# Altium PCB Main_PCB.PcbDoc (part 1 of 2)
Units mm, origin at the board's own origin, x right, y up, seen from the top; angles counter-clockwise.
Board outline 74.9 x 85.44 mm, 4 copper layers (Top Layer, 3V3, GND, Bottom Layer), stack 1.57 mm thick; 139 components, 106 nets, 541 pads, 0 vias.
Unrouted connection lines stored in the file: 412.
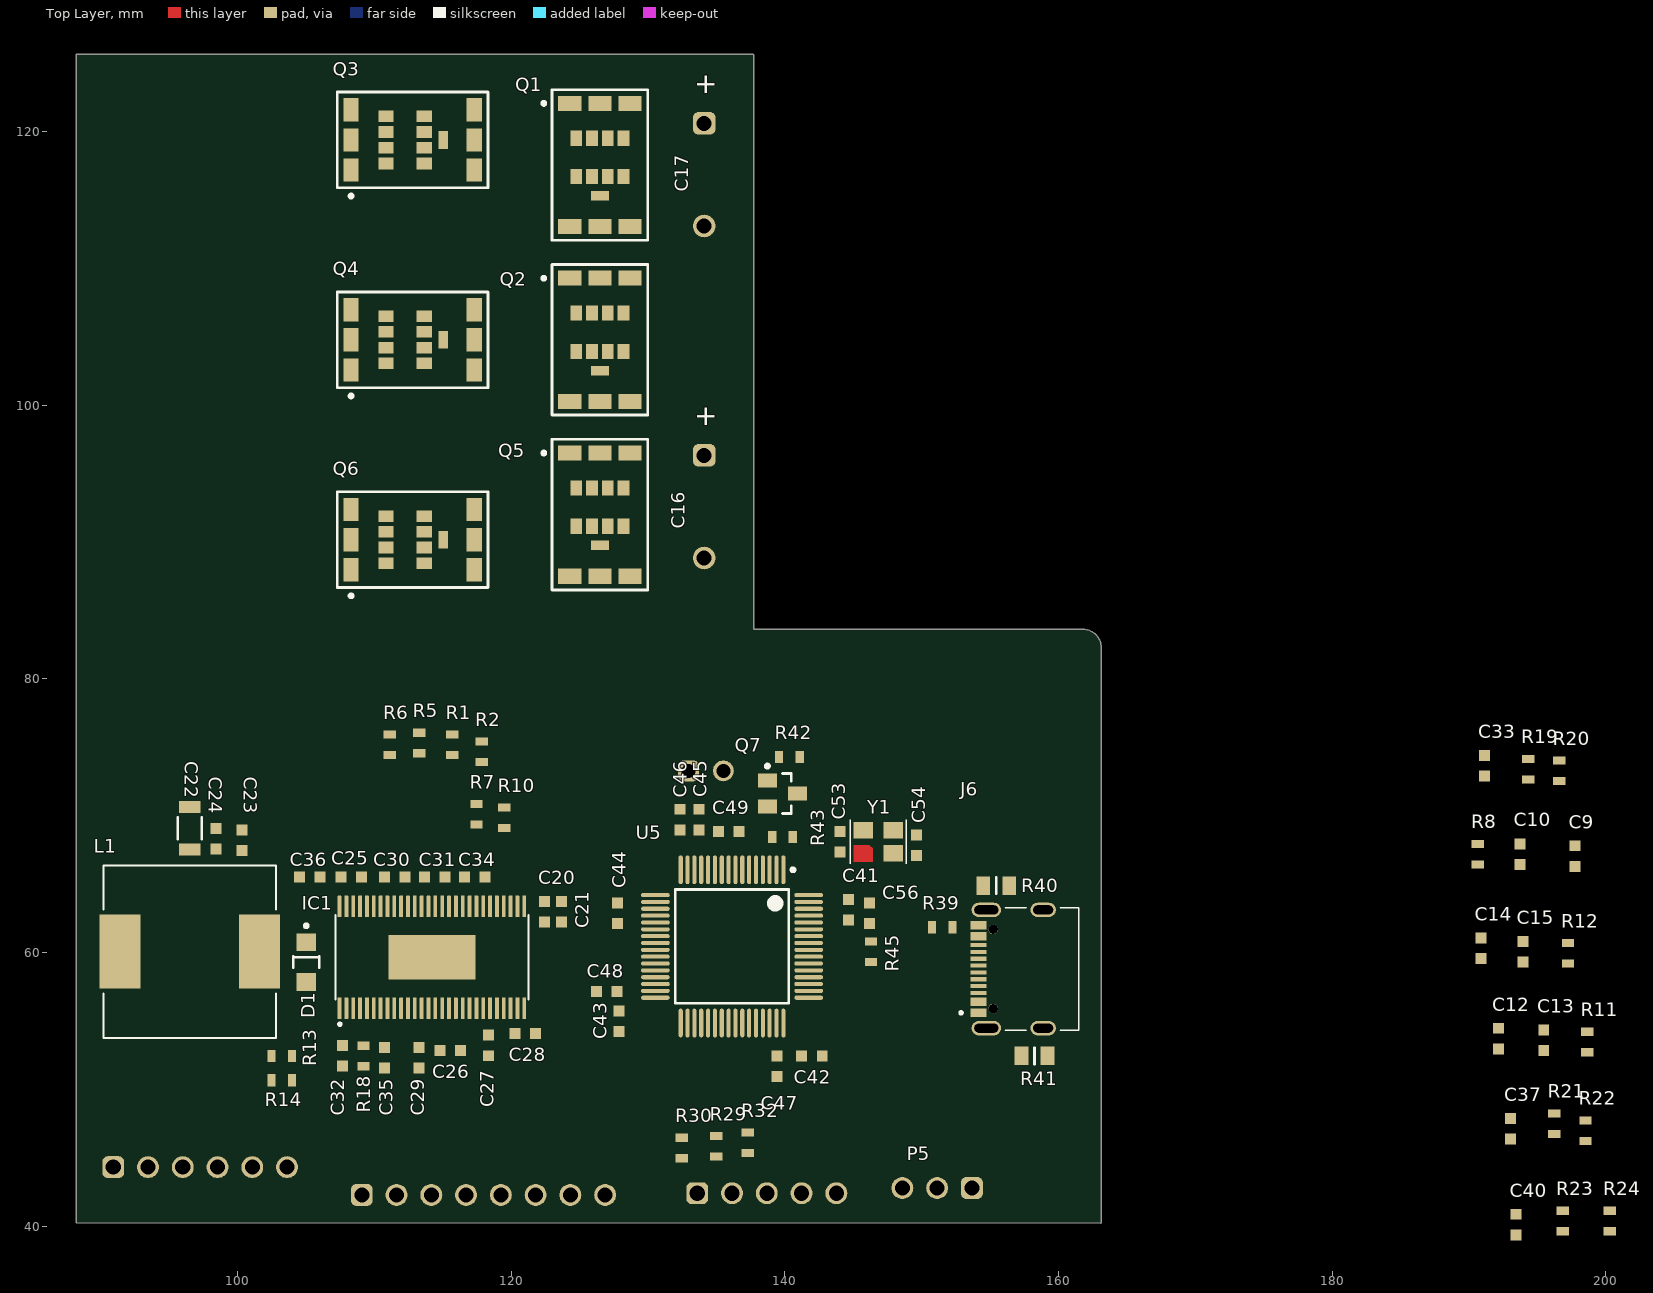
[diagram p0: Top Layer view]
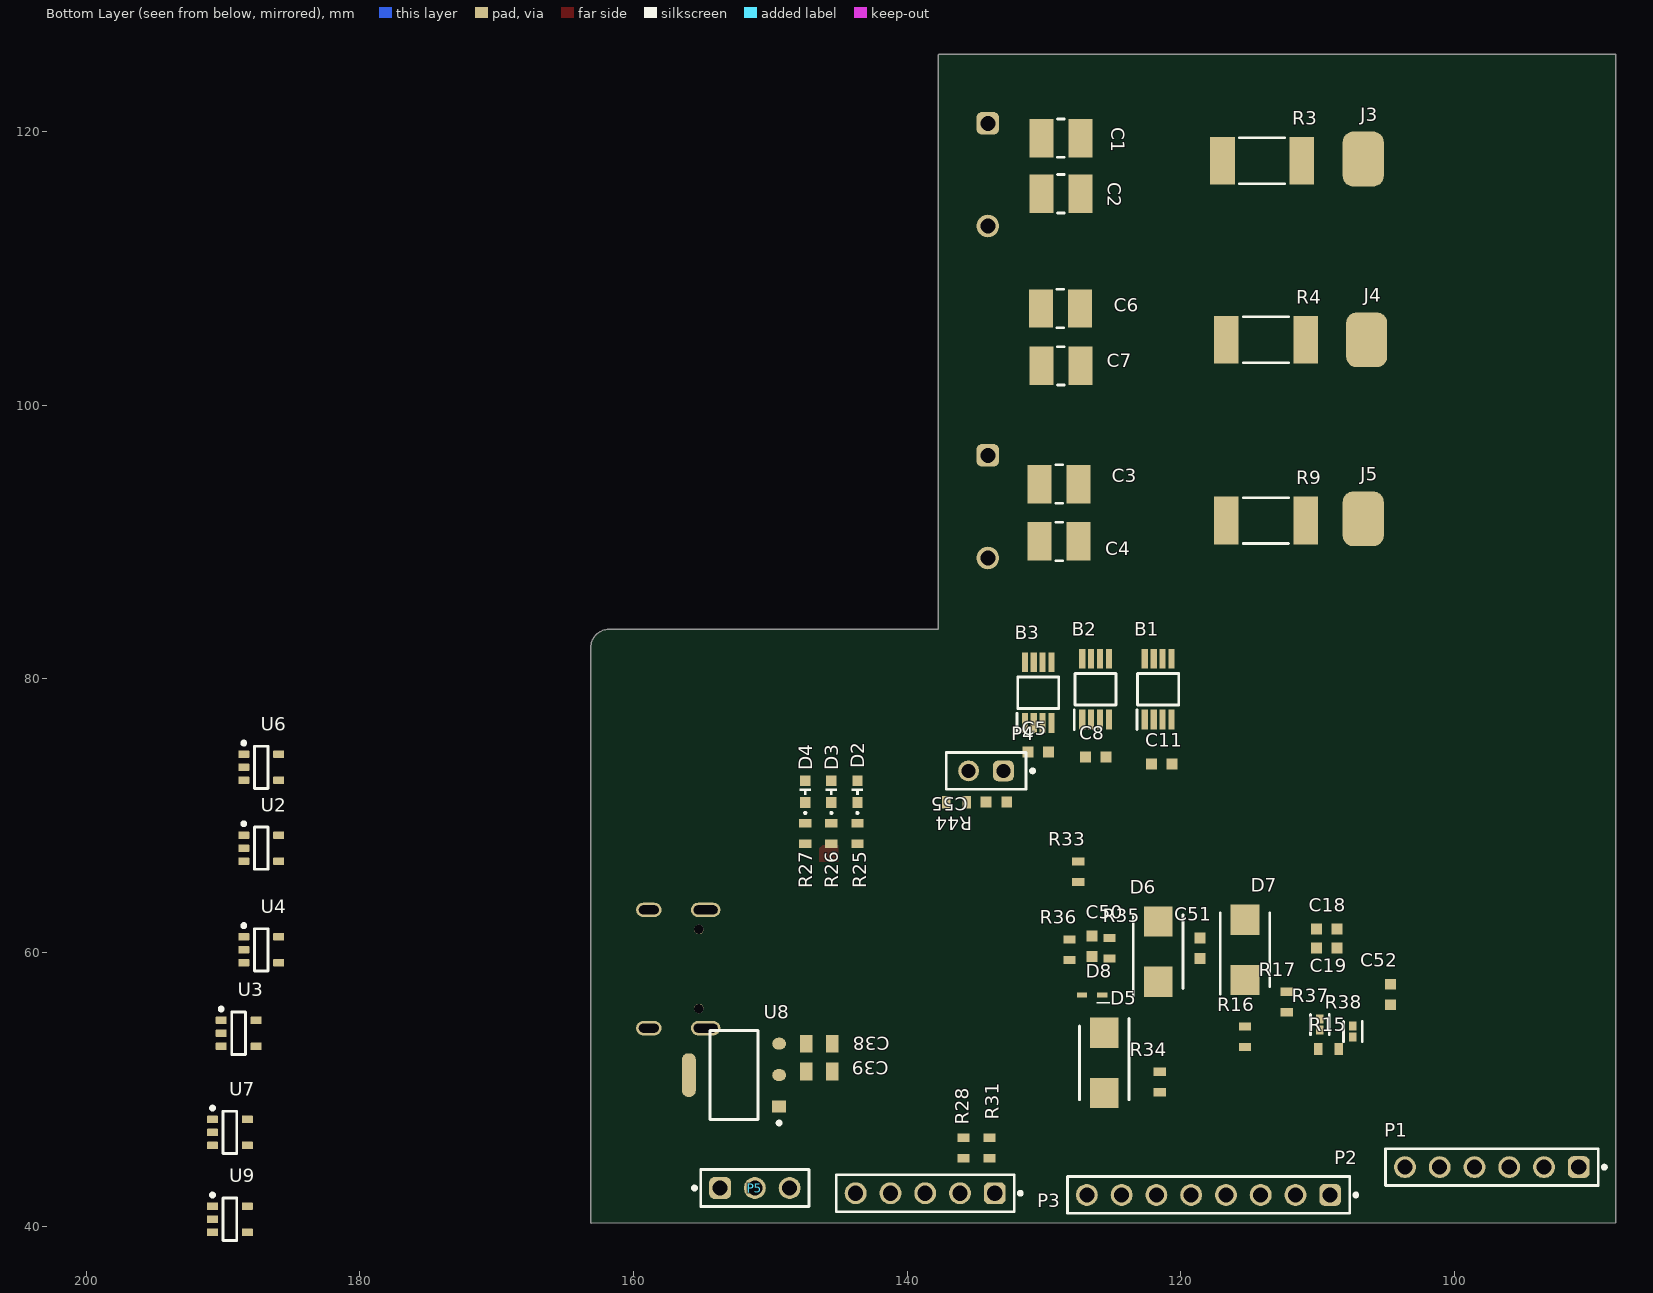
[diagram p1: Bottom Layer view, seen from below]

## Layer stack, top to bottom
Top Solder: solder mask 0.0127, Solder Resist, Dk 3.8
Top Layer: signal copper 0.035
Dielectric 1: prepreg 0.2, 7628, Dk 4.6
3V3: signal copper 0.0175
Core: core 1.065, FR-4, Dk 4.5
GND: signal copper 0.0175
Dielectric 2: prepreg 0.2, 7628, Dk 4.6
Bottom Layer: signal copper 0.035
Bottom Solder: solder mask 0.0127, Solder Resist, Dk 3.8

## Board outline
88.215,40.259 88.215,125.603 88.265,125.653 137.668,125.653 137.718,125.603 137.718,83.616 161.798,83.616 cw(c161.798,82.296) 163.118,82.297 163.118,81.788 163.118,82.296 163.118,40.259 163.068,40.209

## Design rules (kind name [scope] priority, off if disabled: settings)
BoardOutlineClearance [All] p1: gap=0.2 ignorepadtopadclearanceinfootprint=FALSE
Clearance [All] p1: gap=0.127 ignorepadtopadclearanceinfootprint=FALSE except(0.25: Arc-Hole Track-Hole SMDPad-Hole THPad-Hole Via-Hole Fill-Hole Poly-Hole Region-Hole Text-Hole)
ComponentClearance [All] p1: gap=0.127 collisioncheckmode=3 verticalgap=0.127 showdistances=TRUE
DiffPairsRouting [All] p1: maxlimit=0.254 minlimit=0.127 mostfreqgap=0.254 toplayer_prefgap=0.127 toplayer_minwidth=0.127 toplayer_maxwidth=25.4 toplayer_prefwidth=0.127 midlayer1_mingap=0.254 midlayer1_minwidth=0.381 midlayer1_maxwidth=0.381 midlayer1_prefwidth=0.381 midlayer2_mingap=0.254 midlayer2_minwidth=0.381 midlayer2_maxwidth=0.381 midlayer2_prefwidth=0.381 bottomlayer_prefgap=0.127 bottomlayer_minwidth=0.127 bottomlayer_maxwidth=25.4 bottomlayer_prefwidth=0.127 maxuncoupledlength=12.7
Height [All] p1: minheight=0 maxheight=1816.048 prefheight=12.7
HoleSize [All] p1: absolutevalues=TRUE maxlimit=6.3 minlimit=0.15 maxpercent=80.000 minpercent=20.000
HoleToHoleClearance [All] p1: gap=0.25 allowstackedmicrovias=FALSE
MinimumAnnularRing [All] p1: minimumring=0.075
MinimumSolderMaskSliver [All] p1: minsoldermaskwidth=0
PlaneClearance [All] p1: clearance=0.127
PlaneConnect PlaneConnectPowerPads [InPadClass('PowerPads')] p1: planeconnectstyle=Direct reliefexpansion=0.508 reliefentries=4 reliefconductorwidth=0.254 reliefairgap=0.254
PlaneConnect [All] p2: pad.planeconnectstyle=Relief pad.reliefexpansion=0.3 pad.reliefentries=4 pad.reliefconductorwidth=0.127 pad.reliefairgap=0.127 via.planeconnectstyle=Direct via.reliefexpansion=0.3 via.reliefentries=4 via.reliefconductorwidth=0.127 via.reliefairgap=0.127
PolygonConnect PolygonConnectPowerPads [All vs (InPadClass('PowerPads'))] p1: connectstyle=Direct reliefconductorwidth=0.254 reliefentries=4 polygonreliefangle="90 Angle" airgapwidth=0.254
PolygonConnect [All] p2: thpad.connectstyle=Relief thpad.reliefconductorwidth=0.3 thpad.reliefentries=4 thpad.polygonreliefangle="90 Angle" thpad.airgapwidth=0.127 thpad.conductorbypadedge=TRUE thpad.mindistance=0.381 thpad.enablemindistance=FALSE smdpad.connectstyle=Relief smdpad.reliefconductorwidth=0.3 smdpad.reliefentries=4 smdpad.polygonreliefangle="90 Angle" smdpad.airgapwidth=0.127 smdpad.conductorbypadedge=TRUE smdpad.mindistance=0.381 smdpad.enablemindistance=FALSE via.connectstyle=Direct via.reliefconductorwidth=0.127 via.reliefentries=4 via.polygonreliefangle="90 Angle" via.airgapwidth=0.127
RoutingVias [All] p1: holewidth=0.3 width=0.6 viastyle="Through Hole" minholewidth=0.3 minwidth=0.6 maxholewidth=0.6 maxwidth=6.6
SilkToSilkClearance [All] p1: silktosilkclearance=0
SilkToSolderMaskClearance [IsPad] p1: minsilkscreentomaskgap=0.127 clearancetoexposedcopper=TRUE
SolderMaskExpansion SolderMaskExpansionVia [isVia] p1: expansion=0.102 istentingtop=TRUE
SolderMaskExpansion [All] p2: expansion=0.075 istentingtop=FALSE useseparateexpansions=TRUE expansionbottom=0.075 istentingbottom=FALSE
SupplyNets "Schematic Supply Nets_7" [InNet('VIN')] p1: voltage=0.000
SupplyNets "Schematic Supply Nets_6" [InNet('5V')] p2: voltage=0.000
SupplyNets "Schematic Supply Nets_5" [InNet('3V3')] p3: voltage=0.000
SupplyNets "Schematic Supply Nets_4" [InNet('GND')] p4: voltage=0.000
Width [All] p1: maxlimit=25.4 minlimit=0.127 preferedwidth=0.127 midlayer1_maxwidth=0.254 midlayer2_maxwidth=0.254 minimp=50.000000 maximp=50.000000 favimp=50.000000
20 further rules are at their usual default settings.

## Classes and differential pairs
component class U_STM32F405: C41 C42 C43 C44 C45 C46 C47 C48 C49 C53 C54 J6 R39 R40 R41 U5 Y1
component class U_Power: B1 B2 B3 C1 C2 C3 C4 C5 C6 C7 C8 C9 C10 C11 C12 C13 C14 C15 C16 C17 C55 J3 J4 J5 P4 Q1 Q2 Q3 Q4 Q5 Q6 R1 R2 R3 R4 R5 R6 R7 R8 R9 R10 R11 R12 R44 U2 U3 U4
component class U_DRV8301_Gate_Driver_Buck: C18 C19 C20 C21 C22 C23 C24 C25 C26 C27 C28 C29 C30 C31 C32 C33 C34 C35 C36 C37 C38 C39 C40 D1 IC1 L1 Q7 R13 R14 R15 R16 R17 R18 R19 R20 R21 R22 R23 R24 R42 R43 U1 U6 U7 U8 U9
component class Top_Design: C50 C51 C52 C56 D2 D3 D4 D5 D6 D7 D8 P1 P2 P3 P5 R25 R26 R27 R28 R29 R30 R31 R32 R33 R34 R35 R36 R37 R38 R45

## Components (designator, comment, footprint, x,y, rotation, side; value= is the part's Value field where it differs from the comment)
B1 "AD8418AWBRZ" SOP65P490X110-8N 121.666,79.248 r90 bottom
B2 "AD8418AWBRZ" SOP65P490X110-8N 126.238,79.248 r90 bottom
B3 "AD8418AWBRZ" SOP65P490X110-8N 130.429,78.994 r90 bottom
C1 "HMK325C7475KN-TE" FP-1210-L_3_2_0_3-W_2_5_0-IPC_A 128.778,119.507 r180 bottom
C2 "HMK325C7475KN-TE" FP-1210-L_3_2_0_3-W_2_5_0-IPC_A 128.778,115.443 r180 bottom
C3 "HMK325C7475KN-TE" FP-1210-L_3_2_0_3-W_2_5_0-IPC_A 128.905,94.234 r180 bottom
C4 "HMK325C7475KN-TE" FP-1210-L_3_2_0_3-W_2_5_0-IPC_A 128.905,90.043 r180 bottom
C5 "Generic Capacitor 4.7uF 0603" "Wurth 0603 capacitor" 130.429,74.649 r180 bottom value=4.7uF
C6 "HMK325C7475KN-TE" FP-1210-L_3_2_0_3-W_2_5_0-IPC_A 128.806,107.061 r180 bottom
C7 "HMK325C7475KN-TE" FP-1210-L_3_2_0_3-W_2_5_0-IPC_A 128.778,102.87 r180 bottom
C8 "Generic Capacitor 4.7uF 0603" "Wurth 0603 capacitor" 126.238,74.295 r180 bottom value=4.7uF
C9 "Generic Capacitor 15nF 0603" "Wurth 0603 capacitor" 197.739,67.056 r90 top value=15nF
C10 "Generic Capacitor 1nF 0603" "Wurth 0603 capacitor" 193.725,67.195 r90 top value=1nF
C11 "Generic Capacitor 4.7uF 0603" "Wurth 0603 capacitor" 121.412,73.787 r0 bottom value=4.7uF
C12 "Generic Capacitor 15nF 0603" "Wurth 0603 capacitor" 192.151,53.721 r90 top value=15nF
C13 "Generic Capacitor 1nF 0603" "Wurth 0603 capacitor" 195.453,53.594 r90 top value=1nF
C14 "Generic Capacitor 15nF 0603" "Wurth 0603 capacitor" 190.881,60.325 r90 top value=15nF
C15 "Generic Capacitor 1nF 0603" "Wurth 0603 capacitor" 193.929,60.071 r90 top value=1nF
C16 "NCC EKY-800ELL681MM25S" "WURTH THT CAP D18H25 - sideways" 134.112,92.583 r90 top value=680µF/80V
C17 "NCC EKY-800ELL681MM25S" "WURTH THT CAP D18H25 - sideways" 134.112,116.84 r90 top value=680µF/80V
C18 "Generic Capacitor 2.2uF 0603" "Wurth 0603 capacitor" 109.347,61.722 r180 bottom value=2.2uF
C19 "Generic Capacitor 100nF 0603" "Wurth 0603 capacitor" 109.347,60.325 r180 bottom value=100nF
C20 "Generic Capacitor 2.2uF 0603" "Wurth 0603 capacitor" 122.428,62.992 r90 top value=2.2uF
C21 "Generic Capacitor 100nF 0603" "Wurth 0603 capacitor" 123.698,62.992 r90 top value=100nF
C22 "Generic Capacitor 47uF 1206" "Wurth 1206 Capacitor" 96.52,69.088 r270 top value=47uF
C23 "Generic Capacitor 1uF 0603" "Wurth 0603 capacitor" 100.33,68.199 r270 top value=1uF
C24 "Generic Capacitor 100nF 0603" "Wurth 0603 capacitor" 98.425,68.326 r90 top value=100nF
C25 "Generic Capacitor 100nF 0603" "Wurth 0603 capacitor" 108.331,65.532 r180 top value=100nF
C26 "Generic Capacitor 22nF 0603" "Wurth 0603 capacitor" 115.57,52.832 r0 top value=22nF
C27 "Generic Capacitor 1uF 0603" "Wurth 0603 capacitor" 118.364,53.213 r90 top value=1uF
C28 "Generic Capacitor 1uF 0603" "Wurth 0603 capacitor" 121.031,54.102 r180 top value=1uF
C29 "Generic Capacitor 2.2uF 0603" "Wurth 0603 capacitor" 113.284,52.324 r90 top value=2.2uF
C30 "Generic Capacitor 100nF 0603" "Wurth 0603 capacitor" 111.506,65.532 r180 top value=100nF
C31 "Generic Capacitor 100nF 0603" "Wurth 0603 capacitor" 114.427,65.532 r180 top value=100nF
C32 "Generic Capacitor 120pF 0603" "Wurth 0603 capacitor" 107.696,52.451 r90 top value=120pF
C33 "Generic Capacitor 100nF 0603" "Wurth 0603 capacitor" 191.135,73.66 r90 top value=100nF
C34 "Generic Capacitor 100nF 0603" "Wurth 0603 capacitor" 117.348,65.532 r180 top value=100nF
C35 "Generic Capacitor 6.8nF 0603" "Wurth 0603 capacitor" 110.744,52.324 r90 top value=6.8nF
C36 "Generic Capacitor 15nF 0603" "Wurth 0603 capacitor" 105.283,65.532 r0 top value=15nF
C37 "Generic Capacitor 100nF 0603" "Wurth 0603 capacitor" 193.04,47.117 r90 top value=100nF
C38 "Generic Capacitor 10uF 0805" "Wurth 0805 capacitor" 146.431,53.34 r0 bottom value=10uF
C39 "Generic Capacitor 10uF 0805" "Wurth 0805 capacitor" 146.431,51.308 r0 bottom value=10uF
C40 "Generic Capacitor 100nF 0603" "Wurth 0603 capacitor" 193.421,40.132 r90 top value=100nF
C41 "Generic Capacitor 2.2uF 0603" "Wurth 0603 capacitor" 144.653,63.119 r90 top value=2.2uF
C42 "Generic Capacitor 2.2uF 0603" "Wurth 0603 capacitor" 141.986,52.451 r180 top value=2.2uF
C43 "Generic Capacitor 2.2uF 0603" "Wurth 0603 capacitor" 127.889,54.991 r90 top value=2.2uF
C44 "Generic Capacitor 2.2uF 0603" "Wurth 0603 capacitor" 127.762,62.865 r90 top value=2.2uF
C45 "Generic Capacitor 2.2uF 0603" "Wurth 0603 capacitor" 133.731,69.723 r270 top value=2.2uF
C46 "Generic Capacitor 2.2uF 0603" "Wurth 0603 capacitor" 132.334,69.723 r270 top value=2.2uF
C47 "Generic Capacitor 2.2uF 0603" "Wurth 0603 capacitor" 139.446,51.689 r90 top value=2.2uF
C48 "Generic Capacitor 2.2uF 0603" "Wurth 0603 capacitor" 127,57.15 r0 top value=2.2uF
C49 "Generic Capacitor 100nF 0603" "Wurth 0603 capacitor" 135.89,68.834 r0 top value=100nF
C50 "Generic Capacitor 1uF 0603" "Wurth 0603 capacitor" 126.492,60.452 r90 bottom value=1uF
C51 "Generic Capacitor 2.2uF 0603" "Wurth 0603 capacitor" 118.618,60.325 r270 bottom value=2.2uF
C52 "Generic Capacitor 100nF 0603" "Wurth 0603 capacitor" 104.697,56.938 r90 bottom value=100nF
C53 "Generic Capacitor 15pF 0603" "Wurth 0603 capacitor" 144.035,68.102 r270 top value=15pF
C54 "Generic Capacitor 15pF 0603" "Wurth 0603 capacitor" 149.623,67.848 r90 top value=15pF
C55 "Generic Capacitor 1uF 0603" "Wurth 0603 capacitor" 133.477,70.993 r180 bottom value=1uF
C56 "Generic Capacitor 100nF 0603" "Wurth 0603 capacitor" 146.177,62.865 r270 top value=100nF
D1 "V1FM10-M3/H" FP-V1FM10-M3-H-MFG 105.029,59.309 r90 top
D2 "Green, 3.2V, 140°" "Wurth 0603 LED" 143.637,71.755 r90 bottom
D3 "Red, 2V, 140°" "Wurth 0603 LED" 145.542,71.755 r90 bottom
D4 "Blue, 3.2V, 140°" "Wurth 0603 LED" 147.447,71.755 r90 bottom
D5 "SS34" "MDD DO-214AC diode" 125.603,51.943 r270 bottom
D6 "SS34" "MDD DO-214AC diode" 121.666,60.071 r90 bottom
D7 "SS34" "MDD DO-214AC diode" 115.316,60.198 r90 bottom
D8 "ROHM EDZVT2R3.6B" "ROHM SOD-523 zener" 126.492,56.896 r0 bottom
IC1 "DRV8301DCA" "TI HTSSOP-56-6mm" 114.216,59.653 r90 top
J3 "PHASE_A" "Solder Pad 3X4MM" 106.68,117.983 r0 top
J4 "PHASE_B" "Solder Pad 3X4MM" 106.426,104.775 r0 top
J5 "PHASE_C" "Solder Pad 3X4MM" 106.68,91.694 r0 top
J6 "KH-TYPE-C-16P" KINGHELM_KH-TYPE-C-16P 158.877,58.801 r90 top
L1 "FH 33uH 3A" "FH MS127-330MT" 96.52,60.071 r0 top value=33uH
P1 "61300611121" "6x1 2.54mm M" 97.282,44.323 r0 bottom
P2 "61300811121" "8x1 2.54mm M" 117.983,42.291 r0 bottom
P3 "61300511121" "5x1 2.54mm M" 138.684,42.418 r0 bottom
P4 "61300211121" "2x1 2.54mm F" 134.241,73.279 r0 bottom
P5 "61300311121" "3x1 2.54mm M" 151.13,42.799 r180 bottom
Q1 "IRF7749L1" "INFINEON DIRECTFET-L8-V" 126.492,117.55 r0 top
Q2 "IRF7749L1" "INFINEON DIRECTFET-L8-V" 126.492,104.775 r0 top
Q3 "IRF7749L1" "INFINEON DIRECTFET-L8-V" 112.808,119.38 r90 top
Q4 "IRF7749L1" "INFINEON DIRECTFET-L8-V" 112.808,104.775 r90 top
Q5 "IRF7749L1" "INFINEON DIRECTFET-L8-V" 126.492,92 r0 top
Q6 "IRF7749L1" "INFINEON DIRECTFET-L8-V" 112.808,90.17 r90 top
Q7 "BSS123" FAIR-SOT23-3_V 139.827,71.628 r270 top
R1 "Generic Resistor 4k7 0603" "Wurth 0603 Resistor" 115.697,75.184 r90 top value=4R7
R2 "Generic Resistor 4k7 0603" "Wurth 0603 Resistor" 117.856,74.676 r90 top value=4R7
R3 "Yezhan ASR-M-3-0.5F" "WURTH 2512 RESISTOR" 114.067,117.856 r0 bottom value=0.5m
R4 "Yezhan ASR-M-3-0.5F" "WURTH 2512 RESISTOR" 113.792,104.775 r0 bottom value=0.5m
R5 "Generic Resistor 4k7 0603" "Wurth 0603 Resistor" 113.284,75.311 r90 top value=4R7
R6 "Generic Resistor 4k7 0603" "Wurth 0603 Resistor" 111.125,75.184 r90 top value=4R7
R7 "Generic Resistor 4k7 0603" "Wurth 0603 Resistor" 117.475,70.104 r90 top value=4R7
R8 "Generic Resistor 1k 0603" "Wurth 0603 Resistor" 190.627,67.195 r270 top value=1k
R9 "Yezhan ASR-M-3-0.5F" "WURTH 2512 RESISTOR" 113.792,91.567 r0 bottom value=0.5m
R10 "Generic Resistor 4k7 0603" "Wurth 0603 Resistor" 119.507,69.85 r90 top value=4R7
R11 "Generic Resistor 1k 0603" "Wurth 0603 Resistor" 198.628,53.467 r270 top value=1k
R12 "Generic Resistor 1k 0603" "Wurth 0603 Resistor" 197.231,59.944 r90 top value=1k
R13 "Generic Resistor 50k 0603" "Wurth 0603 Resistor" 103.251,52.451 r180 top value=50k
R14 "Generic Resistor 10k 0603" "Wurth 0603 Resistor" 103.251,50.673 r0 top value=10k
R15 "Generic Resistor 220k 0603" "Wurth 0603 Resistor" 109.22,52.959 r0 bottom value=220k
R16 "Generic Resistor 10k 0603" "Wurth 0603 Resistor" 115.316,53.848 r90 bottom value=10k
R17 "Generic Resistor 10k 0603" "Wurth 0603 Resistor" 112.268,56.388 r90 bottom value=10k
R18 "Generic Resistor 16k2 0603" "Wurth 0603 Resistor" 109.22,52.451 r90 top value=16k2
R19 "Generic Resistor 39k 0603" "Wurth 0603 Resistor" 194.31,73.406 r90 top value=39k
R20 "Generic Resistor 2k2 0603" "Wurth 0603 Resistor" 196.596,73.279 r90 top value=2k2
R21 "Generic Resistor 39k 0603" "Wurth 0603 Resistor" 196.215,47.498 r90 top value=39k
R22 "Generic Resistor 2k2 0603" "Wurth 0603 Resistor" 198.501,46.99 r90 top value=2k2
R23 "Generic Resistor 39k 0603" "Wurth 0603 Resistor" 196.85,40.386 r90 top value=39k
R24 "Generic Resistor 2k2 0603" "Wurth 0603 Resistor" 200.279,40.386 r90 top value=2k2
R25 "Generic Resistor 330R 0603" "Wurth 0603 Resistor" 143.637,68.707 r270 bottom value=330R
R26 "Generic Resistor 330R 0603" "Wurth 0603 Resistor" 145.542,68.707 r270 bottom value=330R
R27 "Generic Resistor 1k 0603" "Wurth 0603 Resistor" 147.447,68.707 r270 bottom value=1k
R28 "Generic Resistor 0R 0603" "Wurth 0603 Resistor" 135.89,45.72 r90 bottom value=0R
R29 "Generic Resistor 2k2 0603" "Wurth 0603 Resistor" 135.001,45.847 r90 top value=2k2
R30 "Generic Resistor 2k2 0603" "Wurth 0603 Resistor" 132.461,45.72 r90 top value=2k2
R31 "Generic Resistor 0R 0603" "Wurth 0603 Resistor" 133.985,45.72 r90 bottom value=0R
R32 "Generic Resistor 2k2 0603" "Wurth 0603 Resistor" 137.287,46.101 r90 top value=2k2
R33 "Generic Resistor 10k 0603" "Wurth 0603 Resistor" 127.508,65.901 r90 bottom value=10k
R34 "Generic Resistor 39k 0603" "Wurth 0603 Resistor" 121.539,50.546 r90 bottom value=39k
R35 "Generic Resistor 52k3 0603" "Wurth 0603 Resistor" 125.222,60.325 r90 bottom value=52k3
R36 "Generic Resistor 220R 0603" "Wurth 0603 Resistor" 128.143,60.21 r90 bottom value=220R
R37 "PRF15BC102RB6RC" FP-PRF15-0_05-IPC_B 109.855,54.737 r90 bottom
R38 "PRF15BC102RB6RC" FP-PRF15-0_05-IPC_B 107.442,54.229 r90 bottom
R39 "Generic Resistor 0R 0603" "Wurth 0603 Resistor" 151.511,61.849 r180 top value=0R
R40 "Generic Resistor 5k1 0805" "0805 Resistor" 155.448,64.897 r0 top value=5k1
R41 "Generic Resistor 5k1 0805" "0805 Resistor" 158.242,52.451 r180 top value=5k1
R42 "Generic Resistor 39k 0603" "Wurth 0603 Resistor" 140.335,74.295 r180 top value=39k
R43 "Generic Resistor 2k2 0603" "Wurth 0603 Resistor" 139.827,68.453 r180 top value=2k2
R44 "Generic Resistor 10k 0603" "Wurth 0603 Resistor" 136.398,70.993 r0 bottom value=10k
R45 "Generic Resistor 100R 0603" "Wurth 0603 Resistor" 146.304,60.071 r90 top value=100R
U2 "SN74LVC1G66DBVR" DBV0005A_L 187.198,67.635 r180 bottom
U3 "SN74LVC1G66DBVR" DBV0005A_L 188.849,54.102 r180 bottom
U4 "SN74LVC1G66DBVR" DBV0005A_L 187.198,60.198 r180 bottom
U5 "STM32F405RGT6" STM-LQFP64_M 136.144,60.452 r270 top
U6 "SN74LVC1G66DBVR" DBV0005A_L 187.198,73.535 r180 bottom
U7 "SN74LVC1G66DBVR" DBV0005A_L 189.484,46.863 r180 bottom
U8 "AMS1117-3.3" FP-AMS1117-IPC_C 152.654,51.054 r0 bottom
U9 "SN74LVC1G66DBVR" DBV0005A_L 189.484,40.513 r180 bottom
Y1 "CF4008M00012001" "huaxindianzi 8MHz Crystal" 146.829,68.102 r0 top value=8MHz

## Footprints (in the part's own frame and the unit in brackets; to place one, negate y for a bottom-side part, rotate by r counter-clockwise, add the part's x,y. Pads: shape width x height; smd on the part's side, far side on the other; paste and mask are expansions set on the pad)
"2x1 2.54mm F" [mm] "Socket Header, Pitch 2.54 mm, THT, Vertical, single row, 2p"
  rrect50% 1.52x1.52 hole 1.02: 1(-1.27,0)
  round 1.52 hole 1.02: 2(1.27,0)
  silkscreen extent -3.52,-1.35 2.92,1.35, body extent -2.79,-1.25 2.79,1.25, height 8.55
"3x1 2.54mm M" [mm] "Pin Header, pitch 2.54 mm, THT, Vertical, single row, 3p"
  rrect50% 1.6x1.6 hole 1.1: 1(-2.54,0)
  round 1.6 hole 1.1: 2(0,0) 3(2.54,0)
  silkscreen extent -4.53,-1.35 3.96,1.35, body extent -3.81,-1.27 3.81,1.27, height 8.57
"5x1 2.54mm M" [mm] "Pin Header, pitch 2.54 mm, THT, Vertical, single row, 5p"
  rrect50% 1.6x1.6 hole 1.1: 1(-5.08,0)
  round 1.6 hole 1.1: 2(-2.54,0) 3(0,0) 4(2.54,0) 5(5.08,0)
  silkscreen extent -7.07,-1.35 6.5,1.35, body extent -6.35,-1.27 6.35,1.27, height 8.57
"6x1 2.54mm M" [mm] "Pin Header, pitch 2.54 mm, THT, Vertical, single row, 6p"
  rrect50% 1.6x1.6 hole 1.1: 1(-6.35,0)
  round 1.6 hole 1.1: 2(-3.81,0) 3(-1.27,0) 4(1.27,0) 5(3.81,0) 6(6.35,0)
  silkscreen extent -8.34,-1.35 7.77,1.35, body extent -7.62,-1.27 7.62,1.27, height 8.57
"8x1 2.54mm M" [mm] "Pin Header, pitch 2.54 mm, THT, Vertical, single row, 8p"
  rrect50% 1.6x1.6 hole 1.1: 1(-8.89,0)
  round 1.6 hole 1.1: 2(-6.35,0) 3(-3.81,0) 4(-1.27,0) 5(1.27,0) 6(3.81,0) 7(6.35,0) 8(8.89,0)
  silkscreen extent -10.88,-1.35 10.31,1.35, body extent -10.16,-1.27 10.16,1.27, height 8.57
"0805 Resistor" [mm]
  rect 1x1.35 smd paste-0.045 mask+0.1: 1(-0.95,0) 2(0.95,0)
  silkscreen extent 0,-0.6 0,0.6, body extent -1,-0.63 1,0.63, height 0.52
DBV0005A_L [mm] "SOT23, 5-Leads, Body 3.05x1.75mm, Pitch 0.95mm, IPC High Density"
  rrect18% 0.8x0.55 smd: 1(-1.275,0.95) 2(-1.275,0) 3(-1.275,-0.95) 4(1.275,-0.95) 5(1.275,0.95)
  silkscreen extent -1.4,-1.55 0.5,1.9, body extent -1.42,-1.46 1.42,1.46, height 1.08
FAIR-SOT23-3_V [mm] "SOT23, 3-Leads, Body 2.92x1.3mm, Pitch 0.95mm"
  rect 1x1.4 smd: 1(-0.95,-1.1) 2(0.95,-1.1) 3(0,1.1)
  silkscreen extent -2.12,-1.22 1.46,0.65, body extent -1.46,-0.65 1.46,0.65, height 1.2
"FH MS127-330MT" [mm] "Precision Wire Wound Inductor, 2-Leads, Body 12,20x12,20mm, IPC Medium Density"
  rect 3x5.4 smd: 1(-5.1,0) 2(5.1,0)
  silkscreen extent -6.3,-6.3 6.3,6.3, body extent -6.3,-6.3 6.3,6.3, height 7.5
FP-1210-L_3_2_0_3-W_2_5_0-IPC_A [mm]
  rect 1.753x2.806 smd paste+0 mask+0: 1(-1.425,0) 2(1.425,0)
  silkscreen extent -0.25,-1.4 0.25,1.4, body extent -1.6,-1.25 1.6,1.25, height 2.1
FP-AMS1117-IPC_C [mm]
  rect 1.004x0.872 smd paste+0 mask+0: 1(-3.295,2.29)
  rrect100% 1.004x0.872 smd paste+0 mask+0: 2(-3.295,0) 3(-3.295,-2.29)
  rrect87% 1.004x3.182 smd paste+0 mask+0: 4(3.295,0)
  silkscreen extent -3.42,-3.25 1.75,3.62, body extent -3.53,-3.25 3.53,3.25, height 1.8
FP-PRF15-0_05-IPC_B [mm]
  rect 0.661x0.572 smd paste+0 mask+0: 1(-0.406,0) 2(0.406,0)
  silkscreen extent -0.74,-0.69 0.74,0.69, body extent -0.5,-0.25 0.5,0.25, height 0.56
FP-V1FM10-M3-H-MFG [mm]
  rect 1.3x1.4 smd paste+0 mask+0: 1(1.45,0) 2(-1.45,0)
  silkscreen extent -0.43,-0.95 2.77,0.95, body extent -2.2,-1.05 2.2,1.05, height 0.25
"huaxindianzi 8MHz Crystal" [mm] "8MHz Crystal Oscillator 12pF ±10ppm ±30ppm SMD3225-4P Crystals ROHS"
  round 0.025 smd paste-0.057 mask+0.1: 1(-1.1,-0.85)
  rect 1.4x1.2 smd paste-0.05 mask+0.1: 2(1.1,-0.85) 3(1.1,0.85) 4(-1.1,0.85)
  Top Layer region: -0.4,-1.45 -1.8,-1.45 -1.8,-0.25 -0.64,-0.25 -0.4,-0.49
  silkscreen extent -2.05,-1.6 2.05,1.6
"INFINEON DIRECTFET-L8-V" [mm] "DIRECTFET, 15 Pin, 9.1mm L X 6.975mm W X 0.74mm H body"
  rect 1.7x1.1 smd paste-0.1 mask+0: 1(-2.2,4.5) 2(0,4.5) 3(2.2,4.5) 13(-2.2,-4.5) 14(0,-4.5) 15(2.2,-4.5)
  rect 0.85x1.1 smd paste-0.6 mask+0: 4(-1.725,1.95) 5(-0.575,1.95) 6(0.575,1.95) 7(1.725,1.95) 8(-1.725,-0.85) 9(-0.575,-0.85) 10(0.575,-0.85) 11(1.725,-0.85)
  rect 1.3x0.7 smd paste-0.4 mask+0: 12(0,-2.25)
  silkscreen extent -4.22,-5.5 3.5,5.5, body extent -3.49,-4.55 3.49,4.55, height 0.75
KINGHELM_KH-TYPE-C-16P [mm]
  rect 0.6x1.15 smd mask+0.05: A1_B12(-3.2,4.725) A4_B9(-2.4,4.725) A9_B4(2.4,4.725) A12_B1(3.2,4.725)
  rect 0.3x1.15 smd mask+0.05: A5(-1.25,4.725) A6(-0.25,4.725) A7(0.25,4.725) A8(1.25,4.725) B5(1.75,4.725) B6(0.75,4.725) B7(-0.75,4.725) B8(-1.75,4.725)
  oval 1.05x1.85 hole 0.65 slot 1.45 at 90 deg mask+0.05: SH1(-4.32,0) SH2(4.32,0)
  oval 1.05x2.15 hole 0.65 slot 1.75 at 90 deg mask+0.05: SH3(-4.32,4.15) SH4(4.32,4.15)
  round 0.7 hole 0.7 unplated: ""(-2.89,3.65) ""(2.89,3.65)
  silkscreen extent -4.47,-2.6 4.47,6.1, body extent -4.47,-2.6 4.47,5.3, height 3.22
"MDD DO-214AC diode" [mm]
  rect 2.2x2.1 smd: 1(-2.2,0) 2(2.2,0)
  silkscreen extent -3.25,-1.81 2.7,1.81, body extent -2.7,-1.81 2.7,1.81, height 2.44
"ROHM SOD-523 zener" [mm]
  rect 0.74x0.39 smd: 1(-0.74,0) 2(0.74,0)
  silkscreen extent -1.3,0.55 -0.33,0.55, body extent -0.8,-0.4 0.8,0.4, height 0.6
"Solder Pad 3X4MM" [mm]
  rrect50% 3x4 smd far side paste-0.134 mask+0.1: 1(0,0)
SOP65P490X110-8N [mm]
  rect 1.45x0.45 smd: 1(-2.225,0.975) 2(-2.225,0.325) 3(-2.225,-0.325) 4(-2.225,-0.975) 5(2.225,-0.975) 6(2.225,-0.325) 7(2.225,0.325) 8(2.225,0.975)
  silkscreen extent -2.95,-1.5 1.15,1.55
STM-LQFP64_M [mm] "Thin QFP, 64-Leads, Body 10x10mm, Pitch 0.5mm, IPC Low Density"
  oval 2.1x0.3 smd: 1(-5.6,3.75) 2(-5.6,3.25) 3(-5.6,2.75) 4(-5.6,2.25) 5(-5.6,1.75) 6(-5.6,1.25) 7(-5.6,0.75) 8(-5.6,0.25) 9(-5.6,-0.25) 10(-5.6,-0.75) 11(-5.6,-1.25) 12(-5.6,-1.75) 13(-5.6,-2.25) 14(-5.6,-2.75) 15(-5.6,-3.25) 16(-5.6,-3.75) 33(5.6,-3.75) 34(5.6,-3.25) 35(5.6,-2.75) 36(5.6,-2.25) 37(5.6,-1.75) 38(5.6,-1.25) 39(5.6,-0.75) 40(5.6,-0.25) 41(5.6,0.25) 42(5.6,0.75) 43(5.6,1.25) 44(5.6,1.75) 45(5.6,2.25) 46(5.6,2.75) 47(5.6,3.25) 48(5.6,3.75)
  oval 0.3x2.1 smd: 17(-3.75,-5.6) 18(-3.25,-5.6) 19(-2.75,-5.6) 20(-2.25,-5.6) 21(-1.75,-5.6) 22(-1.25,-5.6) 23(-0.75,-5.6) 24(-0.25,-5.6) 25(0.25,-5.6) 26(0.75,-5.6) 27(1.25,-5.6) 28(1.75,-5.6) 29(2.25,-5.6) 30(2.75,-5.6) 31(3.25,-5.6) 32(3.75,-5.6) 49(3.75,5.6) 50(3.25,5.6) 51(2.75,5.6) 52(2.25,5.6) 53(1.75,5.6) 54(1.25,5.6) 55(0.75,5.6) 56(0.25,5.6) 57(-0.25,5.6) 58(-0.75,5.6) 59(-1.25,5.6) 60(-1.75,5.6) 61(-2.25,5.6) 62(-2.75,5.6) 63(-3.25,5.6) 64(-3.75,5.6)
  silkscreen extent -5.72,-4.15 4.15,4.58, body extent -5,-5 5,5, height 1.6
"TI HTSSOP-56-6mm" [mm]
  rrect25% 1.57x0.28 smd: 1(-3.72,6.75) 2(-3.72,6.25) 3(-3.72,5.75) 4(-3.72,5.25) 5(-3.72,4.75) 6(-3.72,4.25) 7(-3.72,3.75) 8(-3.72,3.25) 9(-3.72,2.75) 10(-3.72,2.25) 11(-3.72,1.75) 12(-3.72,1.25) 13(-3.72,0.75) 14(-3.72,0.25) 15(-3.72,-0.25) 16(-3.72,-0.75) 17(-3.72,-1.25) 18(-3.72,-1.75) 19(-3.72,-2.25) 20(-3.72,-2.75) 21(-3.72,-3.25) 22(-3.72,-3.75) 23(-3.72,-4.25) 24(-3.72,-4.75) 25(-3.72,-5.25) 26(-3.72,-5.75) 27(-3.72,-6.25) 28(-3.72,-6.75) 29(3.72,-6.75) 30(3.72,-6.25) 31(3.72,-5.75) 32(3.72,-5.25) 33(3.72,-4.75) 34(3.72,-4.25) 35(3.72,-3.75) 36(3.72,-3.25) 37(3.72,-2.75) 38(3.72,-2.25) 39(3.72,-1.75) 40(3.72,-1.25) 41(3.72,-0.75) 42(3.72,-0.25) 43(3.72,0.25) 44(3.72,0.75) 45(3.72,1.25) 46(3.72,1.75) 47(3.72,2.25) 48(3.72,2.75) 49(3.72,3.25) 50(3.72,3.75) 51(3.72,4.25) 52(3.72,4.75) 53(3.72,5.25) 54(3.72,5.75) 55(3.72,6.25) 56(3.72,6.75)
  rect 3.235x6.35 smd paste-4: 57(0,0)
  silkscreen extent -4.99,-7.05 3.1,7.05, body extent -4.05,-7 4.05,7, height 1.19
"Wurth 0603 capacitor" [mm] "Ceramic Capacitors, body 1.6x0.8mm"
  rect 0.8x0.8 smd: 1(-0.75,0) 2(0.75,0)
  body extent -0.8,-0.4 0.8,0.4, height 0.8
"Wurth 0603 LED" [mm] "SMD Mono-color Chip LED, body 1.6x0.8mm"
  rect 0.8x0.75 smd: 1(-0.8,0) 2(0.8,0)
  silkscreen extent -1.62,-0.4 0.22,0.4, body extent -0.8,-0.4 0.8,0.4, height 0.42
"Wurth 0603 Resistor" [mm] "Fixed Thick Film, body 1.60 x 0.80 mm"
  rect 0.6x0.9 smd paste-0.028 mask+0.1: 1(-0.75,0) 2(0.75,0)
  body extent -0.8,-0.4 0.8,0.4, height 0.45
"Wurth 0805 capacitor" [mm] "Ceramic Capacitors, body 2x1.25mm"
  rect 0.9x1.3 smd: 1(-0.95,0) 2(0.95,0)
  body extent -1,-0.63 1,0.63, height 1.25
"Wurth 1206 Capacitor" [mm] "Ceramic Capacitors, body 3.2x1.6mm"
  rect 0.9x1.6 smd: 1(-1.55,0) 2(1.55,0)
  silkscreen extent -0.8,-0.87 0.8,0.87, body extent -1.6,-0.8 1.6,0.8, height 0.95
"WURTH 2512 RESISTOR" [mm] "Metal Plate Resistors, SMT, body size 6.3x3.1mm"
  rect 1.8x3.5 smd: 1(-2.9,0) 2(2.9,0)
  silkscreen extent -1.65,-1.68 1.65,1.68, body extent -3.15,-1.55 3.15,1.55, height 0.51
"WURTH THT CAP D18H25 - sideways" [mm] "Aluminum Electrolytic Capacitors, 18x25mm"
  rrect50% 1.65x1.65 hole 1.1: 1(3.75,0)
  round 1.65 hole 1.1: 2(-3.75,0)
  body extent -8.99,-28.9 8.99,0.4, height 9.41

## Part data
B1 B2 B3: "Bidir.Zero-Drift Current Sense Amp SOIC8 Analog Devices AD8418AWBRZ, Current Sensing Amplifier Single Buffered 8-Pin SOIC", Manufacturer_Name="Analog Devices", Mouser Part Number=584-AD8418AWBRZ, Arrow Part Number=AD8418AWBRZ, Arrow Price/Stock=https://www.arrow.com/en/products/ad8418awbrz/analog-devices?utm_currency=USD&region=nac, Datasheet Link=http://www.analog.com/media/en/technical-documentation/data-sheets/AD8418A.pdf, Geometry.Height=1.1mm, Manufacturer_Part_Number=AD8418AWBRZ, Mouser Price/Stock=https://www.mouser.co.uk/ProductDetail/Analog-Devices/AD8418AWBRZ?qs=%2F9jDaHz9Z2grAr7OTzLKmg%3D%3D
C1 C2 C3 C4 C6 C7: library part CMP-14477-000323-2, "None", Capacitance=4.7uF, Case Code (Imperial)=1210, Case Code (Metric)=3225, Max Operating Temperature=125°C, Min Operating Temperature=-55°C, Tolerance=10%, Voltage Rating=100V, Case/Package=1210, Mount="Surface Mount", Packaging="Tape and Reel", RoHS Compliant=Yes
C16 C17: library part "NCC 680uF/80V TH", "Bulk/Capacitor, Aluminum, 80 V, Cap.680 , Dia.18 , Leng.25", Case/Package=Radial, Dielectric Material=Aluminium, Leakage Current=544µA, Manufacturer="United Chemi-Con", Manufacturer Part Number=EKY-800ELL681MM25S, Max Operating Temperature=105°C, Min Operating Temperature=-40°C, Ripple Current=1.75A, Supplier Part Number=565-EKY-800ELL681MM25S-ND, Test Frequency=100MHz, Tolerance=20%, Voltage=80V, Category="Aluminum Electrolytic Capacitors", China RoHS=Compliant, ComponentLink1Description=https://datasheet.octopart.com:443/EKY-800ELL681MM25S-Nippon-Chemicon-datasheet-182100250.pdf?src-supplier=IHS, ComponentLink1URL=https://datasheet.octopart.com:443/EKY-800ELL681MM25S-Nippon-Chemicon-datasheet-182100250.pdf?src-supplier=IHS, ComponentLink2Description=https://datasheet.octopart.com:443/EKY-800ELL681MM25S-United-Chemi-Con-datasheet-33024962.pdf?src-supplier=IHS, ComponentLink2URL=https://datasheet.octopart.com:443/EKY-800ELL681MM25S-United-Chemi-Con-datasheet-33024962.pdf?src-supplier=IHS, ComponentLink3Description=https://datasheet.octopart.com:443/EKY-800ELL681MM25S-United-Chemi-Con-datasheet-153683879.pdf?src-supplier=United+Chemi-Con, ComponentLink3URL=https://datasheet.octopart.com:443/EKY-800ELL681MM25S-United-Chemi-Con-datasheet-153683879.pdf?src-supplier=United+Chemi-Con, ComponentLink4Description=https://datasheet.octopart.com:443/EKY-800ELL681MM25S-United-Chemi-Con-datasheet-154730619.pdf?src-supplier=Electro+Sonic, ComponentLink4URL=https://datasheet.octopart.com:443/EKY-800ELL681MM25S-United-Chemi-Con-datasheet-154730619.pdf?src-supplier=Electro+Sonic, Contact Plating=Tin, Diameter=18mm, Dissipation Factor=9%, Height=25mm, Height - Seated (Max)=26.4922mm, Impedance=36mΩ, Lead Free="Lead Free", Lead Pitch=7.493mm, Lead/Base Style=Straight, Length=25mm, Life (Hours)=10000hours, Lifecycle Status=Production, Mounting Technology="Through Hole", Number of Terminals=2, Packaging=Bulk, Pins=2, Polarity=Polar, Pricing="1=2,66, 10=1,772, 50=1,4002, 100=1,283, 500=1,08148, 1000=1,01807, 2500=0,95043, 5000=0,90925 (USD)", Radiation Hardening=No, REACH SVHC=No, RoHS=Compliant, Schedule B=853222***, Stock=70, Supplier=DigiKey, Terminal Pitch=7.5mm, Termination=Radial, Voltage Rating=80V, Voltage Rating (DC)=80V
D1: library part CMP-02539-000045-1, "1A 100V SMF TRENCH SKY RECT", RoHS Compliant=Yes
D2: library part "LED GREEN 0603", "WL-SMCD Mono-color Chip LED Diffused, SMT, size 0603, Green, 3.2V, 140°", Case/Size Code=0603, Emitting Color=Green, Forward Voltage=3.2V, Manufacturer="Wurth Elektronik", Manufacturer Part Number=150060GS55040, Operating Temperature Max=85°C, Operating Temperature Min=-40°C, Category="Signal LEDs", Chip Technology=InGaN, ComponentLink1Description="Website Link", ComponentLink1URL=https://www.we-online.com/redexpert/article/150060GS55040?ad, ComponentLink2Description="Datasheet Link", ComponentLink2URL=https://www.we-online.com/redexpert/spec/150060GS55040?ad, Dominant Wavelength=525nm, Height=0.4mm, Length=1.6mm, Luminous Intensity=430mcd, Match Code=WL-SMCD, Mount="Surface Mount", Packaging="Tape and Reel", Peak Wavelength=520nm, Viewing Angle=140°, Width=0.8mm
D3: library part "LED RED 0603", "WL-SMCD Mono-color Chip LED Diffused, SMT, size 0603, Red, 2V, 140°", Case/Size Code=0603, Emitting Color=Red, Forward Voltage=2V, Manufacturer="Wurth Elektronik", Manufacturer Part Number=150060RS55040, Operating Temperature Max=85°C, Operating Temperature Min=-40°C, Category="Signal LEDs", Chip Technology=AlInGaP, ComponentLink1Description="Website Link", ComponentLink1URL=https://www.we-online.com/redexpert/article/150060RS55040?ad, ComponentLink2Description="Datasheet Link", ComponentLink2URL=https://www.we-online.com/redexpert/spec/150060RS55040?ad, Dominant Wavelength=624nm, Height=0.4mm, Length=1.6mm, Luminous Intensity=90mcd, Match Code=WL-SMCD, Mount="Surface Mount", Packaging="Tape and Reel", Peak Wavelength=632nm, Viewing Angle=140°, Width=0.8mm
D4: library part "LED BLUE 0603", "WL-SMCD Mono-color Chip LED Diffused, SMT, size 0603, Blue, 3.2V, 140°", Case/Size Code=0603, Emitting Color=Blue, Forward Voltage=3.2V, Manufacturer="Wurth Elektronik", Manufacturer Part Number=150060BS55040, Operating Temperature Max=85°C, Operating Temperature Min=-40°C, Category="Signal LEDs", Chip Technology=InGaN, ComponentLink1Description="Website Link", ComponentLink1URL=https://www.we-online.com/redexpert/article/150060BS55040?ad, ComponentLink2Description="Datasheet Link", ComponentLink2URL=https://www.we-online.com/redexpert/spec/150060BS55040?ad, Dominant Wavelength=470nm, Height=0.4mm, Length=1.6mm, Luminous Intensity=80mcd, Match Code=WL-SMCD, Mount="Surface Mount", Packaging="Tape and Reel", Peak Wavelength=465nm, Viewing Angle=140°, Width=0.8mm
D5 D6 D7: library part "MDD SS34", "SS34 Schottky Barrier Diodes (SBD) SMA(DO-214AC) RoHS", Manufacturer_Name=MDD, Datasheet Link=https://datasheet.lcsc.com/szlcsc/MDD-Jiangsu-Yutai-Elec-SS34_C13762.pdf, Geometry.Height=2.44mm, Manufacturer_Part_Number=SS34
D8: library part "3.6V 150mW zener", "Independent 3.6V~3.845V 150mW 3.6V SOD-523 Zener Diodes ROHS"
IC1: "Power MOSFET Tube DRV8301 General Purpose motor driver 60V 1.7A 6.1mm -40C~125C TA", Case/Package="HTSSOP EP", Collector Emitter Voltage (VCEO)=60V, Manufacturer="Texas Instruments", Manufacturer Lifecycle Status=ACTIVE, Max Collector Current=1.7A, Max Operating Temperature=125°C, Min Operating Temperature=-40°C, Min Supply Voltage=8V, Nominal Supply Current=15mA, Supplier Part Number=296-33274-5-ND, Switching Frequency=581kHz, Category="Motor Drivers", ComponentLink1Description=https://sigma.octopart.com:443/184264061/technical_drawing/Texas-Instruments-DRV8301DCA.pdf?src-supplier=Texas+Instruments, ComponentLink1URL=https://sigma.octopart.com:443/184264061/technical_drawing/Texas-Instruments-DRV8301DCA.pdf?src-supplier=Texas+Instruments, ComponentLink2Description=https://octopart.com:443/opatz8j6/c1?t=8IUW2FYany34oJhLIyHX3Y1fI0NJBmozTUbG1CqNyPuNWTClGH-cr3TDyKeqxYPvaWCzT3FtFYre7m4Q0_NcEhaCaz4mrMBkw0JmabNj41SeHht1JXpUurlK2fwJkF59zymHjMraghvG0clGbmEpzk0-1Fi2LYVcqmMUSmJHOw8q5i15A0eOjXHAa3tkv_LsOMxXLpDcJMa_aqbVn0SPweYESkxUytDlv3TAlM6oY4J7IJJC2EjEwwEhPkQH_CuYhf8Ti-24CIEoT0h5OGCtdkTCzKVjqTotWSRYtTVQ0Tt15DGuyh5ljNo7b3BiePRRkOR3ODNP-x8tZIUca-sycMCq3AzyRFgJ2UNMLmvyduJzVS1Z3H-8J0ToKnTQpxkchCca5Q&src-supplier=Texas+Instruments, ComponentLink2URL=https://octopart.com:443/opatz8j6/c1?t=8IUW2FYany34oJhLIyHX3Y1fI0NJBmozTUbG1CqNyPuNWTClGH-cr3TDyKeqxYPvaWCzT3FtFYre7m4Q0_NcEhaCaz4mrMBkw0JmabNj41SeHht1JXpUurlK2fwJkF59zymHjMraghvG0clGbmEpzk0-1Fi2LYVcqmMUSmJHOw8q5i15A0eOjXHAa3tkv_LsOMxXLpDcJMa_aqbVn0SPweYESkxUytDlv3TAlM6oY4J7IJJC2EjEwwEhPkQH_CuYhf8Ti-24CIEoT0h5OGCtdkTCzKVjqTotWSRYtTVQ0Tt15DGuyh5ljNo7b3BiePRRkOR3ODNP-x8tZIUca-sycMCq3AzyRFgJ2UNMLmvyduJzVS1Z3H-8J0ToKnTQpxkchCca5Q&src-supplier=Texas+Instruments, ComponentLink3Description=https://datasheet.octopart.com:443/DRV8301DCA-Texas-Instruments-datasheet-17277489.pdf?src-supplier=Texas+Instruments, ComponentLink3URL=https://datasheet.octopart.com:443/DRV8301DCA-Texas-Instruments-datasheet-17277489.pdf?src-supplier=Texas+Instruments, ComponentLink4Description=https://datasheet.octopart.com:443/DRV8301DCA-Texas-Instruments-datasheet-15540827.pdf?src-supplier=Texas+Instruments, ComponentLink4URL=https://datasheet.octopart.com:443/DRV8301DCA-Texas-Instruments-datasheet-15540827.pdf?src-supplier=Texas+Instruments, ComponentLink5Description=https://datasheet.octopart.com:443/DRV8301DCA-Texas-Instruments-datasheet-11520822.pdf?src-supplier=Texas+Instruments, ComponentLink5URL=https://datasheet.octopart.com:443/DRV8301DCA-Texas-Instruments-datasheet-11520822.pdf?src-supplier=Texas+Instruments, ComponentLink6Description=https://sigma.octopart.com:443/49252451/technical_drawing/Texas-Instruments-DRV8301DCA.pdf?src-supplier=Texas+Instruments, ComponentLink6URL=https://sigma.octopart.com:443/49252451/technical_drawing/Texas-Instruments-DRV8301DCA.pdf?src-supplier=Texas+Instruments, ComponentLink7Description=https://datasheet.octopart.com:443/DRV8301DCA-Texas-Instruments-datasheet-37101717.pdf?src-supplier=Newark, ComponentLink7URL=https://datasheet.octopart.com:443/DRV8301DCA-Texas-Instruments-datasheet-37101717.pdf?src-supplier=Newark, ComponentLink8Description=https://datasheet.octopart.com:443/DRV8301DCA-Texas-Instruments-datasheet-33018439.pdf?src-supplier=Newark, ComponentLink8URL=https://datasheet.octopart.com:443/DRV8301DCA-Texas-Instruments-datasheet-33018439.pdf?src-supplier=Newark, ComponentLink9Description=https://datasheet.octopart.com:443/DRV8301DCA-Texas-Instruments-datasheet-10540733.pdf?src-supplier=Upverter, ComponentLink9URL=https://datasheet.octopart.com:443/DRV8301DCA-Texas-Instruments-datasheet-10540733.pdf?src-supplier=Upverter, ComponentLink10Description=https://datasheet.octopart.com:443/DRV8301DCA-Texas-Instruments-datasheet-102488708.pdf?src-supplier=Farnell, ComponentLink10URL=https://datasheet.octopart.com:443/DRV8301DCA-Texas-Instruments-datasheet-102488708.pdf?src-supplier=Farnell, ComponentLink11Description=https://datasheet.octopart.com:443/DRV8301DCA-Texas-Instruments-datasheet-163231296.pdf?src-supplier=SHENGYU+ELECTRONICS, ComponentLink11URL=https://datasheet.octopart.com:443/DRV8301DCA-Texas-Instruments-datasheet-163231296.pdf?src-supplier=SHENGYU+ELECTRONICS, ComponentLink12Description=https://datasheet.octopart.com:443/DRV8301DCA-Texas-Instruments-datasheet-154627238.pdf?src-supplier=IBE+SMT+Equipment, ComponentLink12URL=https://datasheet.octopart.com:443/DRV8301DCA-Texas-Instruments-datasheet-154627238.pdf?src-supplier=IBE+SMT+Equipment, ComponentLink13Description=http://sigma.octopart.com:80/conflict_mineral_statement/Texas-Instruments-company-63.pdf?src-supplier=Compliance+Statements, ComponentLink13URL=http://sigma.octopart.com:80/conflict_mineral_statement/Texas-Instruments-company-63.pdf?src-supplier=Compliance+Statements, ComponentLink14Description=http://sigma.octopart.com:80/reach_statement/Texas-Instruments-company-64.pdf?src-supplier=Compliance+Statements, ComponentLink14URL=http://sigma.octopart.com:80/reach_statement/Texas-Instruments-company-64.pdf?src-supplier=Compliance+Statements, Height=0m, Lead Free="Lead Free", Length=14mm, Lifecycle Status=Production, Manufacturer Part Number=DRV8301DCA, Max Supply Voltage=60V, Motor Type="Brushless DC (BLDC)", Mounting Technology="Surface Mount", Number Of Outputs=1, Output Current=1.7A, Pins=56, Pricing="1=8,65, 10=6,719, 35=6,08629, 105=5,6881, 280=5,42282, 525=5,28747, 1015=5,16895 (USD)", Radiation Hardening=No, REACH SVHC=No, RoHS=Compliant, Schedule B="8542390000, 8542390000|8542390000|8542390000|8542390000|8542390000", Stock=484, Supplier=DigiKey, Thickness=1.15mm, Width=6.1mm
J3 J4 J5: library part "Solder pad"
J6: Package=None, Availability="Not in stock", Check_prices=https://www.snapeda.com/parts/KH-TYPE-C-16P/Ki/view-part/?ref=eda, MF=kinghelm, MP=KH-TYPE-C-16P, Price=None, SnapEDA_Link=https://www.snapeda.com/parts/KH-TYPE-C-16P/Ki/view-part/?ref=snap
P1: library part 6P, "WR-PHD Pin Header, THT, Vertical, pitch 2.54mm, 1 Row, 6P", Contact Resistance=20mOhm, Manufacturer="Wurth Elektronik", Operating Temperature Max=105°C, Operating Temperature Min=-40°C, Rated Current=3A, Withstanding Voltage=500V, Working Voltage=250V, Category="Board-to-Board Connectors", ComponentLink1Description="Website Link", ComponentLink1URL=https://www.we-online.com/redexpert/article/61300611121?ad, ComponentLink2Description="Datasheet Link", ComponentLink2URL=https://www.we-online.com/redexpert/spec/61300611121?ad, Gender="Pin Header", Manufacturer Part Number=61300611121, Match Code=WR-PHD, Mount="Through Hole", Number of Pins=6, Number of Rows=1, Orientation=Vertical, Packaging=Bag, Pitch=2.54mm
P2: library part 8P, "WR-PHD Pin Header, THT, Vertical, pitch 2.54mm, 1 Row, 8P", Contact Resistance=20mOhm, Manufacturer="Wurth Elektronik", Operating Temperature Max=105°C, Operating Temperature Min=-40°C, Rated Current=3A, Withstanding Voltage=500V, Working Voltage=250V, Category="Board-to-Board Connectors", ComponentLink1Description="Website Link", ComponentLink1URL=https://www.we-online.com/redexpert/article/61300811121?ad, ComponentLink2Description="Datasheet Link", ComponentLink2URL=https://www.we-online.com/redexpert/spec/61300811121?ad, Gender="Pin Header", Manufacturer Part Number=61300811121, Match Code=WR-PHD, Mount="Through Hole", Number of Pins=8, Number of Rows=1, Orientation=Vertical, Packaging=Bag, Pitch=2.54mm
P3: library part 5P, "WR-PHD Pin Header, THT, Vertical, pitch 2.54mm, 1 Row, 5P", Contact Resistance=20mOhm, Manufacturer="Wurth Elektronik", Operating Temperature Max=105°C, Operating Temperature Min=-40°C, Rated Current=3A, Withstanding Voltage=500V, Working Voltage=250V, Category="Board-to-Board Connectors", ComponentLink1Description="Website Link", ComponentLink1URL=https://www.we-online.com/redexpert/article/61300511121?ad, ComponentLink2Description="Datasheet Link", ComponentLink2URL=https://www.we-online.com/redexpert/spec/61300511121?ad, Gender="Pin Header", Manufacturer Part Number=61300511121, Match Code=WR-PHD, Mount="Through Hole", Number of Pins=5, Number of Rows=1, Orientation=Vertical, Packaging=Bag, Pitch=2.54mm
P4: library part 2P, "WR-PHD Pin Header, THT, Vertical, pitch 2.54mm, 1 Row, 2P", Contact Resistance=20mOhm, Manufacturer="Wurth Elektronik", Operating Temperature Max=105°C, Operating Temperature Min=-40°C, Rated Current=3A, Withstanding Voltage=500V, Working Voltage=250V, Category="Board-to-Board Connectors", ComponentLink1Description="Website Link", ComponentLink1URL=https://www.we-online.com/redexpert/article/61300211121?ad, ComponentLink2Description="Datasheet Link", ComponentLink2URL=https://www.we-online.com/redexpert/spec/61300211121?ad, Gender="Pin Header", Manufacturer Part Number=61300211121, Match Code=WR-PHD, Mount="Through Hole", Number of Pins=2, Number of Rows=1, Orientation=Vertical, Packaging=Bag, Pitch=2.54mm
P5: library part 3P, "WR-PHD Pin Header, THT, Vertical, pitch 2.54mm, 1 Row, 3P", Contact Resistance=20mOhm, Manufacturer="Wurth Elektronik", Operating Temperature Max=105°C, Operating Temperature Min=-40°C, Rated Current=3A, Withstanding Voltage=500V, Working Voltage=250V, Category="Board-to-Board Connectors", ComponentLink1Description="Website Link", ComponentLink1URL=https://www.we-online.com/redexpert/article/61300311121?ad, ComponentLink2Description="Datasheet Link", ComponentLink2URL=https://www.we-online.com/redexpert/spec/61300311121?ad, Gender="Pin Header", Manufacturer Part Number=61300311121, Match Code=WR-PHD, Mount="Through Hole", Number of Pins=3, Number of Rows=1, Orientation=Vertical, Packaging=Bag, Pitch=2.54mm
Q1 Q2 Q3 Q4 Q5 Q6: "Insulated-Gate Field-Effect Transistor (IGFET), N-Channel, Enhancement, Body Diode, Pin 1 Drain, 2 Drain, 3 Drain , 4 Source, 5 Source, 6 Source, 7 Source, 8 Source, 9 Source, 10 Source, 11 Source, 12 Gate, 13 Drain, 14 Drain, 15 Drain, 15 Pins", Manufacturer="Infineon Technologies", Manufacturer Order Number=IRF7749L1, PackageReference="DirectFET L8"
Q7: library part CMP-2000-04934-1, "N-Channel Logic Level Enhancement Mode Field Effect Transistor, 1.7 V, -55 to 150 degC, 3-Pin SOT-23, RoHS, Tape and Reel", Manufacturer=Fairchild, Maximum Continuous Drain Current=0.17A, Maximum Drain Source Voltage=100V, Maximum Gate Source Voltage=±20V, Operating Temperature=-55to150degC, Package=3SOT-23, Package Description="3-Pin Small Outline Transistor, Body 2.92 x 1.325 mm, Pitch 0.95 mm", Package Reference=SOT23-3, Package Version="Rev. 12, 03/2016", Category=MOSFET, Channel Mode=Enhancement, Channel Type=N, Datasheet URL=https://www.fairchildsemi.com/datasheets/BS/BSS123.pdf, Datasheet Version=Jun-03, Manufacturer URL=https://www.fairchildsemi.com/, Mounting=SurfaceMount, Package URL=http://www.fairchildsemi.com/dwg/MA/MA03D.pdf, Packaging=Tape&Reel, Rad Hard=No, RDS-on=6000@10VmOhm, Typical Fall Time=2.4ns, Typical Rise Time=9ns, Typical Turn-Off Delay Time=17ns, Typical Turn-On Delay Time=1.7ns
R1 R2 R5 R6 R7 R10: library part "Generic Resistor 4R7 0603"
R3 R4 R9: "6W 0.5mΩ Patch Splitter ±115ppm/℃ ±1% 2512 Current Sense Resistors / Shunt Resistors ROHS"
R37 R38: library part CMP-06022-000468-1, "THERMISTOR PTC 1K OHM 50% 0402", Case Code (Imperial)=0402, Case Code (Metric)=1005, Max Operating Temperature=130°C, Min Operating Temperature=-40°C, Package Quantity=10000, Resistance=1kR, Tolerance=50%, Voltage=32V, Case/Package=0402, Depth=0.5mm, Height=0.5mm, Length=1mm, Mount="Surface Mount", Number of Pins=2, Packaging="Tape and Reel", Termination=SMD/SMT, Width=0.5mm
U2 U3 U4 U6 U7 U9: library part CMP-0859-00173-3, "Single Analog Switch, DBV0005A, LARGE T&R", F @ Nom Voltage(Max)(Mhz)=150, Generic Part Number=SN74LVC1G66, ICC @ Nom Voltage(Max)(mA)=0.01, Manufacturer="Texas Instruments", Operating Temperature Range(C)="-40 to 85", Rating=Catalog, tpd @ Nom Voltage(Max)(ns)=2,1.2,0.8,0.6, Voltage(Nom)(V)=1.8,2.5,3.3,5, 3-State Output=No, Bits(#)=1, Channels(#)=1, DatasheetVersion=SCES323O, Input Type=CMOS/TTL, Logic=True, Output Drive (IOL/IOH)(Max)(mA)=32/-32, Output Type=CMOS, PackageReference=DBV0005A, Schmitt Trigger=No, Switch Configuration=SPST, Technology Family=LVC, VCC(Max)(V)=5.5, VCC(Min)(V)=1.65
U5: library part CMP-0243-00019-3, "ARM Cortex-M4 32-bit MCU+FPU, 210 DMIPS, 1024 kB Flash, 192 kB Internal RAM, 51 I/Os, 64-pin LQFP, -40 to 85 degC, Tray", I/Os (High Current)=51, Manufacturer=STMicroelectronics, Operating Frequency(F) (Processor speed) (MHz)=168, Supply Voltage(Vcc) max (V)=3.6, Supply Voltage(Vcc) min (V)=1.8, ComponentLink1Description="Manufacturer URL", ComponentLink1URL=http://www.st.com/web/en/home.html, ComponentLink2Description=Datasheet, ComponentLink2URL=http://www.st.com/st-web-ui/static/active/en/resource/technical/document/datasheet/DM00037051.pdf, ComponentLink3Description="Package Specification", ComponentLink3URL=http://www.st.com/st-web-ui/static/active/en/resource/technical/document/datasheet/DM00037051.pdf, Core="ARM Cortex-M4", D/A Converter=2x12-bit, DatasheetVersion="Rev. 4", FLASH Size (Prog) (kB)=1024, Internal RAM Size (kB)=192, Mounting Technology="Surface Mount", PackageDescription="64-Pin Low Profile Quad Flat Package, 10 x 10 mm Body, 0.5 mm Pitch", PackageReference=LQFP64, PackageVersion="Rev. 4, 06/2013", Packing=Tray, PartNumber=STM32F405RGT6
U8: library part CMP-209535-000001-1, "LDO Voltage Regulators 1A, 3.3V", Dropout Voltage=1.1V, Manufacturer="Advanced Monolithic Systems", Max Junction Temp=+125°C, Max Power Dissipation=1.2W, Max Supply Voltage=15V, Nominal Supply Current=5mA, Output Current=1A, Output Voltage=3.3V, Package=AMS1117, Temperature="-40°C to +125°C", Temperature Range Low=-40°C, Automotive=No, Category=IC, ComponentLink2Description=Datasheet, ComponentLink2URL=http://www.advanced-monolithic.com/pdf/ds1117.pdf, Device Class L1="Integrated Circuits (ICs)", Device Class L2="Power Management ICs", Device Class L3="Voltage Regulators - Linear", Height=1.8mm, Ipc Land Pattern Name=SOT229P700X180-4, Lead Free=Yes, Manufacturer Part Number=AMS1117-3.3, Number Of Outputs=1, Octopart=https://octopart.com/ams1117-3.3-advanced+monolithic+systems-25899300, Output Type=Fixed, RoHS=TRUE, Standoff Height=0.64mm, Temperature Range High=+125°C
Y1: library part "8MHz huaxindianzi Crystal"

## Nets (pads, with @x,y where several pads share a name; then routed paths per layer and width w, separated by ;. In a path a pad name is that pad's centre, name@x,y a point inside that pad or via, vN(x,y) a via of type N, cw(c..) or ccw(c..) an arc to the next point about the centre after c; other vN are vias at no path point)
3V3: B1.6 B1.7 B2.6 B2.7 B3.6 B3.7 C5.2 C8.2 C11.2 C39.2 C41.2 C42.2 C43.2 C44.2 C45.2 C46.2 D4.2 IC1.49 P2.2 P3.5 R28.2 R33.2 R44.2 U2.5 U3.5 U4.5 U5.1 U5.13 U5.19 U5.32 U5.48 U5.64 U6.5 U7.5 U8.2 U8.4 U9.5
5V: C22.2 C23.2 C24.1 C38.2 L1.1 P2.1 P5.2 Q7.1 R13.2 R31.2 R39.2 U8.3
AVDD: C28.2 IC1.24 IC1.27
BST_A: C30.2 IC1.48
BST_B: C31.2 IC1.43
BST_C: C34.2 IC1.38
DVDD: C27.2 IC1.23
EN_BUCK: C52.2 D8.1 IC1.55 R34.1 R35.1
FILT_EN: U2.4 U3.4 U4.4 U5.54
GND: B1.2 B1.3 B2.2 B2.3 B3.2 B3.3 C1.2 C2.2 C3.2 C4.2 C5.1 C6.2 C7.2 C8.1 C9.1 C10.1 C11.1 C12.1 C13.1 C14.1 C15.1 C16.2 C17.2 C55.1 IC1.34 IC1.39 IC1.44 P4.2 Q3.4 Q3.5 Q3.6 Q3.7 Q3.8 Q3.9 Q3.10 Q3.11 Q4.4 Q4.5 Q4.6 Q4.7 Q4.8 Q4.9 Q4.10 Q4.11 Q6.4 Q6.5 Q6.6 Q6.7 Q6.8 Q6.9 Q6.10 Q6.11 U2.3 U3.3 U4.3
GND: C18.1 C19.1 C20.1 C21.1 C22.1 C23.1 C24.2 C27.1 C28.1 C29.1 C32.1 C35.1 C36.1 C38.1 C39.1 C41.1 C42.1 C43.1 C44.1 C45.1 C46.1 C47.1 C48.1 C49.1 C50.1 C51.1 C52.1 C53.1 C54.1 C56.1 D1.2 D7.2 D8.2 IC1.28 IC1.30 IC1.31 IC1.32 IC1.33 IC1.57 J6.A1_B12 J6.A12_B1 J6.SH1 J6.SH2 J6.SH3 J6.SH4 P1.6 P2.3 P3.3 P5.1 R14.1 R15.1 R16.1 R17.1 R20.1 R22.1 R24.1 R25.2 R26.2 R27.2 R40.1 R41.1 R43.1 U5.12 U5.18 U5.60 U5.63 U6.1 U6.3 U7.1 U7.3 U8.1 U9.1 U9.3 Y1.2 Y1.4
GVDD: C29.2 IC1.13
I_A: B1.5 R8.2
I_B: B2.5 R11.2
I_C: B3.5 R12.2
NetB1_1: B1.1 J3.1 R3.1
NetB2_1: B2.1 J4.1 R4.1
NetB3_1: B3.1 J5.1 R9.1
NetC9_2: C9.2 U2.2
NetC10_2: C10.2 R8.1 U2.1 U5.9
NetC12_2: C12.2 U3.2
NetC13_2: C13.2 R11.1 U3.1 U5.8
NetC14_2: C14.2 U4.2
NetC15_2: C15.2 R12.1 U4.1 U5.10
NetC25_2: C25.2 IC1.52
NetC26_1: C26.1 IC1.14
NetC26_2: C26.2 IC1.15
NetC32_2: C32.2 IC1.2 R18.2
NetC33_1: C33.1 R19.1 R20.2 U5.14
NetC33_2: C33.2 U6.2
NetC35_2: C35.2 R18.1
NetC36_2: C36.2 IC1.56
NetC37_1: C37.1 R21.1 R22.2 U5.15
NetC37_2: C37.2 U7.2
NetC40_1: C40.1 R23.1 R24.2 U5.16
NetC40_2: C40.2 U9.2
NetC47_2: C47.2 U5.47
NetC48_2: C48.2 U5.31
NetC49_2: C49.2 P3.1 U5.7
NetC50_2: C50.2 P1.2 R33.1 U5.24
NetC51_2: C51.2 D6.2 D7.1 R36.1
NetC53_2: C53.2 U5.6 Y1.1
NetC54_2: C54.2 U5.5 Y1.3
NetC55_2: C55.2 P4.1 R44.1 U5.17
NetC56_2: C56.2 R45.2 U5.58
NetD2_1: D2.1 R25.1
NetD2_2: D2.2 U5.26
NetD3_1: D3.1 R26.1
NetD3_2: D3.2 U5.27
NetD4_1: D4.1 R27.1
NetD5_1: D5.1 R34.2
NetD6_1: D6.1 R35.2 R37.2
NetIC1_1: IC1.1 R15.2
NetIC1_6: IC1.6 U5.59
NetIC1_7: IC1.7 R17.2
NetIC1_8: IC1.8 U5.40
NetIC1_9: IC1.9 U5.56
NetIC1_10: IC1.10 U5.55
NetIC1_11: IC1.11 U5.51
NetIC1_16: IC1.16 R16.2 U5.57
NetIC1_17: IC1.17 U5.41
NetIC1_18: IC1.18 U5.34
NetIC1_19: IC1.19 U5.42
NetIC1_20: IC1.20 U5.35
NetIC1_21: IC1.21 U5.43
NetIC1_22: IC1.22 U5.36
NetIC1_35: IC1.35 R10.1
NetIC1_37: IC1.37 R7.1
NetIC1_40: IC1.40 R6.1
NetIC1_42: IC1.42 R2.1
NetIC1_45: IC1.45 R5.1
NetIC1_47: IC1.47 R1.1
NetJ6_A4_B9: J6.A4_B9 J6.A9_B4 R39.1
NetJ6_A5: J6.A5 R40.2
NetJ6_B5: J6.B5 R41.2
NetP1_1: P1.1 R28.1 R29.1 R30.1 R31.1 R32.1
NetP1_3: P1.3 R29.2 U5.37
NetP1_4: P1.4 R30.2 U5.38
NetP1_5: P1.5 R32.2 U5.39
NetP2_4: P2.4 U5.21
NetP2_5: P2.5 U5.30
NetP2_6: P2.6 U5.23
NetP2_7: P2.7 U5.22
NetP3_2: P3.2 U5.46
NetP3_4: P3.4 U5.49
NetP5_3: P5.3 R45.1
NetQ1_12: Q1.12 R1.2
NetQ2_12: Q2.12 R2.2
NetQ3_12: Q3.12 R5.2
NetQ4_12: Q4.12 R6.2
NetQ5_12: Q5.12 R7.2
NetQ6_12: Q6.12 R10.2
NetQ7_2: Q7.2 R43.2 U5.11
NetQ7_3: Q7.3 R42.1
NetR37_1: R37.1 R38.2
PH: C25.1 D1.1 IC1.50 IC1.51 L1.2
SENS_FILTER: U5.2 U6.4 U7.4 U9.4
SH_A: B1.8 C30.1 D5.2 IC1.46 Q1.4 Q1.5 Q1.6 Q1.7 Q1.8 Q1.9 Q1.10 Q1.11 Q3.1 Q3.2 Q3.3 Q3.13 Q3.14 Q3.15 R3.2 R19.2
SH_B: B2.8 C31.1 IC1.41 Q2.4 Q2.5 Q2.6 Q2.7 Q2.8 Q2.9 Q2.10 Q2.11 Q4.1 Q4.2 Q4.3 Q4.13 Q4.14 Q4.15 R4.2 R21.2
SH_C: B3.8 C34.1 IC1.36 Q5.4 Q5.5 Q5.6 Q5.7 Q5.8 Q5.9 Q5.10 Q5.11 Q6.1 Q6.2 Q6.3 Q6.13 Q6.14 Q6.15 R9.2 R23.2
SHUTDOWN: R36.2 U5.25
SWITCH: P2.8 R38.1
USB_DN: J6.A7 J6.B7 U5.44
USB_DP: J6.A6 J6.B6 U5.45